# EAGLE board Sensor-amplification_V3 (EAGLE 7.4.0)
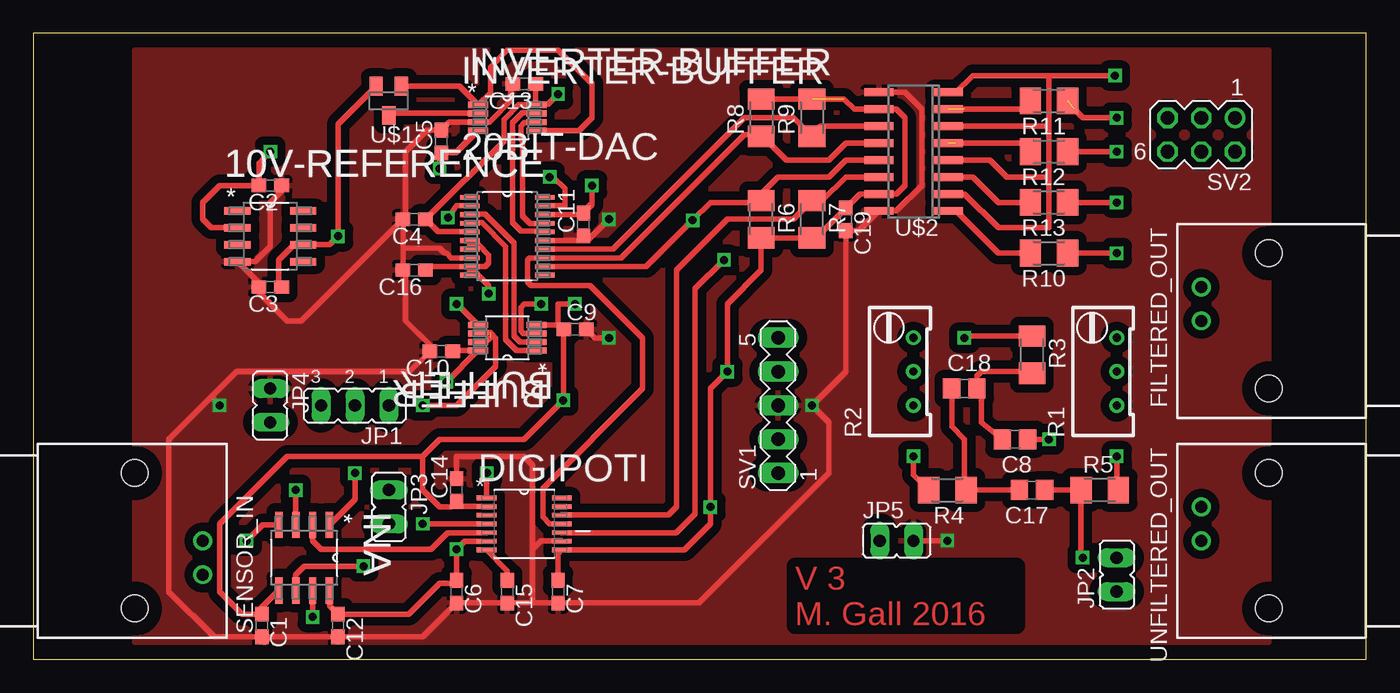
[diagram p0: board, top side]
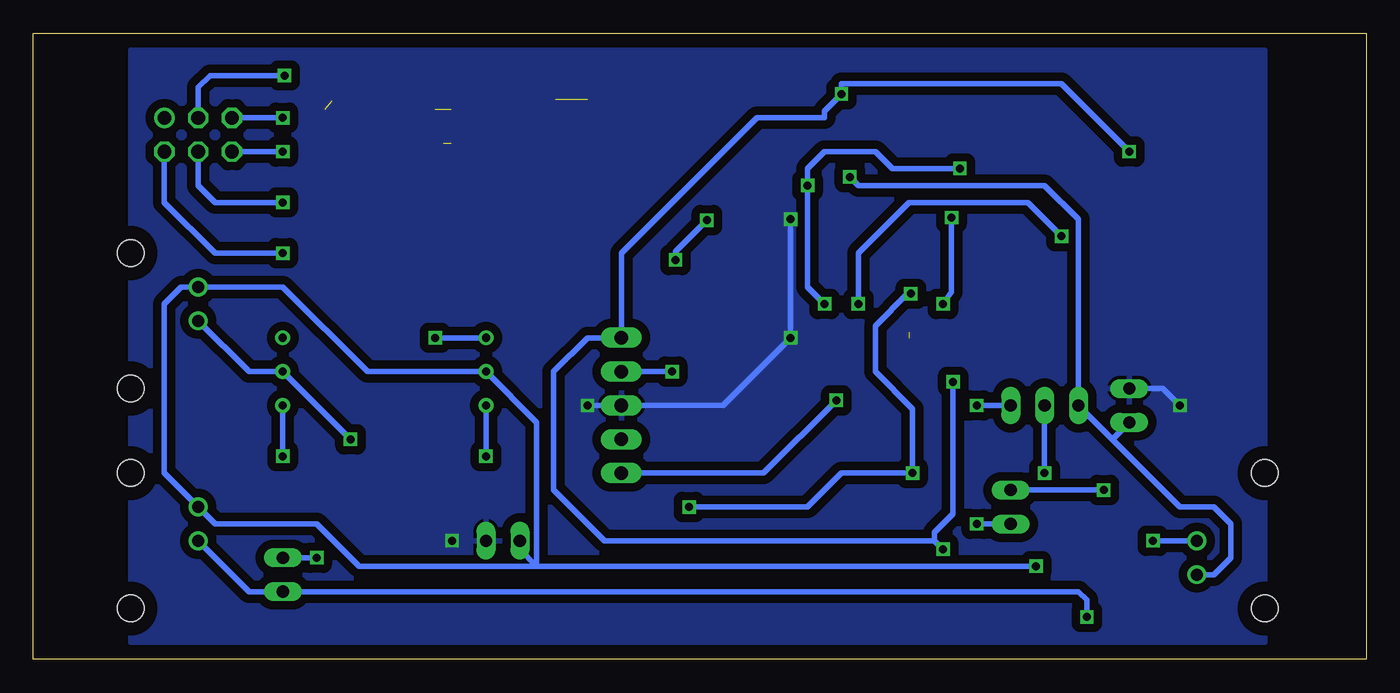
[diagram p1: board, bottom side, seen from below]

Size 100 x 46.98 mm. Coordinates in mm from the lower left corner, seen from the top.
Outline: 0,0 100,0 100,46.98 0,46.98 0,0
Copper layers (1*16): Top 0.035mm / dielectric 1.5mm / Bottom 0.035mm
Design rules "default": minimum track width 10mil, minimum drill 24mil, track to track 8mil, track to pad 8mil, pad to pad 8mil, via to via 8mil, smd to smd 8mil, copper to edge 40mil, drill to drill 8mil, minimum pad ring 10mil, minimum via ring 8mil, stop-mask expansion 4mil, vias tented up to drill 0mil, thermal gap 10mil

## Footprints (pad centres in the part's own frame; a part is rotated, then mirrored left to right if it is on the bottom)
SOIC127P600X175-8N = smd 1.981 x 0.559: 1 -2.464,1.905; 2 -2.464,0.635; 3 -2.464,-0.635; 4 -2.464,-1.905; 5 2.464,-1.905; 6 2.464,-0.635; 7 2.464,0.635; 8 2.464,1.905
SOP65P640X120-20N = smd 1.473 x 0.356: 1 -2.819,2.921; 2 -2.819,2.286; 3 -2.819,1.626; 4 -2.819,0.965; 5 -2.819,0.33; 6 -2.819,-0.33; 7 -2.819,-0.965; 8 -2.819,-1.626; 9 -2.819,-2.286; 10 -2.819,-2.921; 11 2.819,-2.921; 12 2.819,-2.286; 13 2.819,-1.626; 14 2.819,-0.965; 15 2.819,-0.33; 16 2.819,0.33; 17 2.819,0.965; 18 2.819,1.626; 19 2.819,2.286; 20 2.819,2.921
SOP65P490X110-8N = smd 1.499 x 0.457: 1 -2.184,0.965; 2 -2.184,0.33; 3 -2.184,-0.33; 4 -2.184,-0.965; 5 2.184,-0.965; 6 2.184,-0.33; 7 2.184,0.33; 8 2.184,0.965
C0603 = smd 1.1 x 1: 1 -0.85,0; 2 0.85,0
C0805 = smd 1.3 x 1.5: 1 -0.95,0; 2 0.95,0
SOP65P640X120-14N = smd 1.473 x 0.356: 1 -2.819,1.956; 2 -2.819,1.295; 3 -2.819,0.66; 4 -2.819,0; 5 -2.819,-0.66; 6 -2.819,-1.295; 7 -2.819,-1.956; 8 2.819,-1.956; 9 2.819,-1.295; 10 2.819,-0.66; 11 2.819,0; 12 2.819,0.66; 13 2.819,1.295; 14 2.819,1.956
AMP_227161 = drill 0.9 pad 1.27: 1 0,-5.08; 2 -2.54,-5.08 | hole 2: -5.08,0; 5.08,0
JP2 = drill 0.914 long: 1 -2.54,0; 2 0,0; 3 2.54,0
JP1 = drill 0.914 long: 1 0,-1.27; 2 0,1.27
RTRIM64W = drill 0.61: 1 1.27,-2.54; 2 1.27,0; 3 1.27,2.54
M1206 = smd 1.6 x 2: 1 -1.4,0; 2 1.4,0
MA05-1 = drill 1.016 long: 1 -5.08,0; 2 -2.54,0; 3 0,0; 4 2.54,0; 5 5.08,0
MA03-2 = drill 1.016: 1 -2.54,-1.27 | drill 1.016 octagon: 2 -2.54,1.27; 3 0,-1.27; 4 0,1.27; 5 2.54,-1.27; 6 2.54,1.27
SOT23 = smd 1 x 1.4: 1 -0.95,-1.1; 2 0.95,-1.1; 3 0,1.1
SO16 = smd 0.6 x 2.2: 1 -4.445,-2.6; 2 -3.175,-2.6; 3 -1.905,-2.6; 4 -0.635,-2.6; 5 0.635,-2.6; 6 1.905,-2.6; 7 3.175,-2.6; 8 4.445,-2.6; 9 4.445,2.6; 10 3.175,2.6; 11 1.905,2.6; 12 0.635,2.6; 13 -0.635,2.6; 14 -1.905,2.6; 15 -3.175,2.6; 16 -4.445,2.6

## Placement (x,y rotation side)
10V-REFERENCE  ADR01BRZ  [SOIC127P600X175-8N]  17.78,31.75 0 top
20BIT-DAC  AD5791ARUZ  [SOP65P640X120-20N]  35.56,31.75 0 top
BUFFER  AD8676ARMZ  [SOP65P490X110-8N]  35.56,24.13 180 top
C1  100n  [C0603]  17.14,2.54 270 top
C2  100n  [C0603]  17.78,35.56 180 top
C3  100n  [C0603]  17.78,27.94 180 top
C4  100n  [C0603]  28.57,33.02 180 top
C5  100n  [C0603]  30.61,38.86 90 top
C6  100n  [C0603]  31.75,5.08 270 top
C7  100n  [C0603]  39.37,5.08 270 top
C8  10n  [C0805]  73.66,16.51 180 top
C9  100n  [C0603]  40.64,24.77 0 top
C10  100n  [C0603]  30.61,23.11 180 top
C11  100n  [C0603]  41.27,32.64 90 top
C12  100n  [C0603]  22.86,2.54 270 top
C13  100n  [C0603]  36.83,43.18 180 top
C14  100n  [C0603]  31.75,12.7 90 top
C15  1µ  [C0603]  35.56,5.08 270 top
C16  100n  [C0603]  28.57,29.21 180 top
C17  10n  [C0805]  74.93,12.7 180 top
C18  10n  [C0805]  69.85,20.32 0 top
C19  100n  [C0603]  60.96,33.02 270 top
DIGIPOTI  AD5293BRUZ-100  [SOP65P640X120-14N]  36.83,10.16 0 top
FILTERED_OUT  1-227161-7  [AMP_227161]  92.71,25.4 270 top
INA  AD8421ARZ  [SOIC127P600X175-8N]  20.32,7.62 270 top
INVERTER-BUFFER  AD8676ARMZ  [SOP65P490X110-8N]  35.56,40.64 0 top
JP1  [JP2]  24.13,19.05 180 top
JP2  [JP1]  81.28,6.35 0 top
JP3  [JP1]  26.67,11.43 180 top
JP4  [JP1]  17.78,19.05 180 top
JP5  [JP1]  64.77,8.89 270 top
R1  2k  [RTRIM64W]  80.01,21.59 0 top
R2  500  [RTRIM64W]  64.77,21.59 0 top
R3  330  [M1206]  74.93,22.86 270 top
R4  330  [M1206]  68.58,12.7 180 top
R5  5600  [M1206]  80.01,12.7 0 top
R6  470  [M1206]  54.61,33.02 270 top
R7  470  [M1206]  58.42,33.02 270 top
R8  470  [M1206]  54.61,40.64 90 top
R9  470  [M1206]  58.42,40.64 90 top
R10  680  [M1206]  76.2,30.48 180 top
R11  680  [M1206]  76.2,41.91 180 top
R12  680  [M1206]  76.2,38.1 180 top
R13  680  [M1206]  76.2,34.29 180 top
SENSOR_IN  1-227161-7  [AMP_227161]  7.62,8.89 90 top
SV1  [MA05-1]  55.88,19.05 90 top
SV2  [MA03-2]  87.63,39.37 180 top
U$1  MPMT2001AT5  [SOT23]  26.67,41.91 180 top
U$2  ACSL-6400  [SO16]  66.04,38.1 90 top
UNFILTERED_OUT  1-227161-7  [AMP_227161]  92.71,8.89 270 top

## Library data of the parts
10V-REFERENCE = NaLi-specific; MPN: ADR01BRZ; OC_FARNELL: 2305769; OC_NEWARK: 59K2657; PACKAGE: SOIC-8; SUPPLIER: Analog Devices
20BIT-DAC = NaLi-specific; MPN: AD5791ARUZ; OC_FARNELL: 2074863; OC_NEWARK: 18T2142; PACKAGE: TSSOP-20; SUPPLIER: Analog Devices
BUFFER INVERTER-BUFFER = NaLi-specific; MPN: AD8676ARMZ; OC_FARNELL: 1776909; OC_NEWARK: 45P6471; PACKAGE: MSOP-8; SUPPLIER: ANALOG DEVICES
C1-C19 R1-R13 = resistor
DIGIPOTI = NaLi-specific; MPN: AD5293BRUZ-100; OC_FARNELL: -; OC_NEWARK: 52R8122; PACKAGE: TSSOP-14; SUPPLIER: Analog Devices
FILTERED_OUT SENSOR_IN UNFILTERED_OUT = con-coax; MF: TYCO ELECTRONICS; MPN: 1-227161-7; OC_FARNELL: unknown; OC_NEWARK: 09H7855
INA = NaLi-specific; MPN: AD8421ARZ; OC_FARNELL: 2126090; OC_NEWARK: 94T9482; PACKAGE: SOIC-8; SUPPLIER: Analog Devices
JP1-JP5 = jumper
SV1 SV2 = con-lstb; OC_FARNELL: unknown; OC_NEWARK: unknown
U$1 U$2 = NaLi-specific

## Nets
+5V: 20BIT-DAC.6 20BIT-DAC.7 20BIT-DAC.9 20BIT-DAC.10 C7.1 C16.1 C19.1 DIGIPOTI.1 DIGIPOTI.8 R6.2 R7.2 R8.2 R9.2 SV1.4 U$2.10 U$2.15
+15V: 10V-REFERENCE.2 20BIT-DAC.5 BUFFER.8 C2.2 C4.1 C6.1 C10.1 C12.1 C13.1 DIGIPOTI.6 INA.8 INVERTER-BUFFER.8 SV1.5
-15V: 20BIT-DAC.18 BUFFER.4 C1.1 C5.1 C9.1 C11.2 C14.1 DIGIPOTI.2 INA.5 INVERTER-BUFFER.4 SV1.1
AGND: 10V-REFERENCE.4 20BIT-DAC.8 20BIT-DAC.15 C1.2 C2.1 C3.2 C4.2 C5.2 C6.2 C7.2 C9.2 C10.2 C11.1 C12.2 C13.2 C14.2 C15.2 C16.2 C19.2 DIGIPOTI.9 INVERTER-BUFFER.3 JP4.1 JP5.2 SV1.3 U$2.9 U$2.16
DIN: 20BIT-DAC.12 DIGIPOTI.10 R6.1 U$2.13
N$1: INA.7 JP2.1 UNFILTERED_OUT.1
N$2: FILTERED_OUT.2 INA.6 JP5.1 R2.2 UNFILTERED_OUT.2
N$3: INA.3 JP3.1
N$4: DIGIPOTI.5 INA.2
N$5: INA.4 SENSOR_IN.1
N$6: 20BIT-DAC.19 JP1.3 JP4.2 SENSOR_IN.2
N$7: INA.1 JP1.2
N$8: DIGIPOTI.4 JP3.2
N$9: 10V-REFERENCE.6 BUFFER.3 C3.1 U$1.2
N$10: 20BIT-DAC.2 BUFFER.5
N$11: 20BIT-DAC.4 BUFFER.1
N$12: 20BIT-DAC.3 BUFFER.2
N$13: INVERTER-BUFFER.2 U$1.3
N$14: 20BIT-DAC.16 INVERTER-BUFFER.7
N$15: 20BIT-DAC.17 INVERTER-BUFFER.6
N$16: INVERTER-BUFFER.1 INVERTER-BUFFER.5 U$1.1
N$17: C15.1 DIGIPOTI.7
N$18: C17.2 C18.1 R4.1
N$19: C8.2 C18.2 R3.2
N$20: C8.1 FILTERED_OUT.1 R1.2
N$21: C17.1 JP2.2 R5.1
N$22: R2.3 R3.1
N$23: R2.1 R4.2
N$24: R1.1 R5.2
N$25: SV2.3 U$2.2 U$2.4 U$2.6 U$2.8
N$26: R11.2 U$2.7
N$27: R12.2 U$2.5
N$28: R13.2 U$2.3
N$29: R10.1 SV2.2
N$30: R10.2 U$2.1
N$31: R13.1 SV2.4
N$32: R12.1 SV2.6
N$33: R11.1 SV2.5
SCLK: 20BIT-DAC.13 DIGIPOTI.11 R8.1 U$2.12
SUBSTRACT_SELECT: BUFFER.6 BUFFER.7 JP1.1
SYNC-DAC: 20BIT-DAC.14 R9.1 U$2.11
SYNC-POTI: DIGIPOTI.12 R7.1 U$2.14

## Tracks (layer width: path | path; a pad name or v marks a point on that pad's centre or on a via)
+5V  (via drill 0.6)  (1 unrouted)
  Top 0.406: C7.1 39.37,7.92 DIGIPOTI.8 48.84,8.2 50.8,10.16 v50.8,11.43 50.8,20.32 v52.07,21.59 52.07,26.67 54.61,29.21 R6.2 R7.2 58.71,31.62 C19.1 62.02,34.92 U$2.15 64.77,34.92 65.41,35.56 65.41,40.64 64.77,41.27 U$2.10 61.59,41.27 60.83,42.04 R8.2 | C16.1 29.68,29.46 20BIT-DAC.9 | 20BIT-DAC.10 20BIT-DAC.9 | DIGIPOTI.1 34.01,13.95 v34.04,13.97 | v34.16,27.43 34.16,28.04 20BIT-DAC.9 | 20BIT-DAC.9 33.91,29.46 34.16,29.72 34.16,30.35 33.4,31.11 33.07,31.11 20BIT-DAC.7 20BIT-DAC.6
  Bottom 0.406: v50.8,11.43 41.91,11.43 39.37,13.97 v34.04,13.97 34.04,18.8 36.83,21.59 36.83,25.02 34.42,27.43 v34.16,27.43 | SV1.4 v52.07,21.59
+15V  (via drill 0.6)
  Top 0.406: INA.8 22.23,4.03 C12.1 28.16,3.39 30.48,5.71 31.54,5.71 C6.1 v31.75,8.26 32.36,8.87 DIGIPOTI.6 | INVERTER-BUFFER.8 37.68,41.67 C13.1 | 10V-REFERENCE.2 13.34,32.38 12.7,33.02 12.7,34.29 13.97,35.56 C2.2 16.93,37.25 v17.78,38.1 | 20BIT-DAC.5 30.36,32.08 C4.1 35.31,38.9 35.31,40.51 36.4,41.6 INVERTER-BUFFER.8 | C10.1 31.51,23.16 BUFFER.8 33.33,23.16 v30.99,20.83 | v39.37,42.42 38.61,41.66 37.8,41.66 INVERTER-BUFFER.8
  Bottom 0.406: 32.38,8.89 57.15,8.89 60.96,12.7 60.96,21.59 58.42,24.13 SV1.5 55.88,30.48 45.72,40.64 40.64,40.64 40.64,41.15 v39.37,42.42 39.37,43.18 22.86,43.18 v17.78,38.1 | 32.38,8.89 v31.75,8.26 | 32.38,8.89 32.38,9.53 30.99,10.92 v30.99,20.83
-15V  (via drill 0.6)
  Top 0.406: INA.5 17.14,3.89 C1.1 15.66,3.39 13.97,5.08 13.97,10.16 19.05,15.24 29.21,15.24 | DIGIPOTI.2 32.15,11.46 C14.1 31.33,11.43 30.48,11.43 29.21,12.7 29.21,15.24 | C5.1 31.71,38.01 INVERTER-BUFFER.4 33.33,39.67 31.75,38.1 30.48,38.1 v30.48,36.83 | 39.37,25.09 39.46,25.09 C9.1 39.79,19.47 v39.75,19.43 36.83,16.51 30.48,16.51 29.21,15.24 | 39.37,25.09 BUFFER.4 | 41.91,34.29 41.91,34.12 C11.2 41.16,33.38 20BIT-DAC.18 41,33.38 41.91,34.29 | 41.91,34.29 v41.91,35.56 | v40.64,26.67 39.37,26.67 39.37,25.09
  Bottom 0.406: SV1.1 45.21,13.97 v39.75,19.43 | v30.48,36.83 35.56,36.83 36.83,38.1 40.64,38.1 41.91,36.83 v41.91,35.56 41.91,27.94 v40.64,26.67
AGND  (via drill 0.6)
  Top 0.406: U$2.9 65.41,42.55 66.67,41.27 66.67,35.56 64.77,33.66 U$2.16 61.95,32.17 C19.2 60.96,21.59 v58.42,19.05 59.69,17.78 59.69,13.97 49.95,4.23 C7.2 37.47,4.23 | 37.47,4.23 C15.2 C6.2 29.21,1.69 C12.2 17.78,1.69 | 17.78,1.69 C1.2 13.55,1.69 10.16,5.08 10.16,16.51 13.34,19.68 | DIGIPOTI.9 39.62,8.89 38.1,8.89 37.47,8.26 | 37.47,8.26 37.47,4.23 | C2.1 18.63,35.14 17.78,34.29 17.78,30.99 16.64,29.84 10V-REFERENCE.4 16.93,28.23 C3.2 16.93,27.52 19.05,25.4 20.11,25.4 C4.2 | 27.73,30.73 C16.2 27.94,29 27.94,25.4 29.76,23.58 C10.2 28.23,21.59 15.24,21.59 13.34,19.68 | 27.73,30.73 C4.2 | C4.2 27.94,33.23 27.94,38.1 29.55,39.71 C5.2 31.2,40.31 INVERTER-BUFFER.3 34.21,40.31 35.81,41.91 35.81,43.01 C13.2 | 17.36,1.27 17.78,1.69 | 20BIT-DAC.15 40.91,31.42 | 40.91,31.42 C11.1 | 40.91,31.42 41.58,31.42 v43.18,33.02 | v43.18,24.13 42.12,24.13 C9.2 | 37.47,8.26 37.47,14.61 36.83,15.24 31.75,15.24 C14.2 | 20BIT-DAC.8 31.34,30.12 30.99,30.48 30.86,30.48 30.48,30.86 27.85,30.86 27.73,30.73 | v13.97,19.05 13.34,19.68 | JP5.2 v68.58,8.89
  Bottom 0.406: v43.18,33.02 v43.18,24.13 48.26,19.05 SV1.3 v58.42,19.05 | JP4.1 15.24,20.32 v13.97,19.05
  pour Top (isolate 0.635): 7.62,45.72 7.62,1.27 92.71,1.27 92.71,45.72
  pour Bottom (isolate 0.635): 7.62,45.72 7.62,1.27 92.71,1.27 92.71,45.72
DIN  (via drill 0.6)
  Top 0.406: U$2.13 60.96,37.47 59.69,36.2 55.88,36.2 54.61,34.92 R6.1 54.48,34.29 50.8,34.29 v49.47,32.96 45.97,29.46 20BIT-DAC.12 | DIGIPOTI.10 48.23,9.5 49.66,10.92 49.66,27.81 v51.82,29.97
  Bottom 0.406: v51.82,29.97 51.82,30.61 v49.47,32.96
N$1  (via drill 0.6)
  Top 0.406: INA.7 v20.95,3.17
  Bottom 0.406: UNFILTERED_OUT.1 83.82,5.08 JP2.1 21.59,5.08 20.95,4.45 v20.95,3.17
N$2  (via drill 0.6)
  Top 0.406: INA.6 19.68,6.35 20.32,6.99 v24.77,6.99
  Bottom 0.406: 62.23,6.99 75.56,6.99 78.74,10.16 86.36,10.16 UNFILTERED_OUT.2 90.17,13.97 90.17,26.67 88.9,27.94 FILTERED_OUT.2 81.28,27.94 74.93,21.59 R2.2 62.23,17.78 62.23,6.99 | 62.23,6.99 v24.77,6.99 | 62.23,6.99 63.5,8.26 JP5.1
N$3  (via drill 0.6)
  Top 0.406: v19.68,12.7 INA.3
  Bottom 0.406: JP3.1 v19.68,12.7
N$4
  Top 0.406: INA.2 20.95,8.89 21.59,8.26 29.84,8.26 31.09,9.5 DIGIPOTI.5
N$5  (via drill 0.6)
  Top 0.406: v16,8.89 17.2,10.08 INA.4
  Bottom 0.406: SENSOR_IN.1 v16,8.89
N$6  (via drill 0.6)
  Top 0.406: 20BIT-DAC.19 39.88,34.04 39.88,35.31 38.99,36.2 v38.73,36.2
  Bottom 0.406: SENSOR_IN.2 11.43,6.35 10.16,7.62 10.16,10.16 11.43,11.43 13.97,11.43 19.05,16.51 | 19.05,16.51 JP1.3 21.59,33.02 24.13,35.56 38.1,35.56 v38.73,36.2 | JP4.2 19.05,16.51
N$7  (via drill 0.6)
  Top 0.406: INA.1 24.13,11.99 v24.13,13.97
  Bottom 0.406: v24.13,13.97 JP1.2
N$8  (via drill 0.6)
  Top 0.406: v29.21,10.16 DIGIPOTI.4
  Bottom 0.406: JP3.2 v29.21,10.16
N$9  (via drill 0.6)
  Top 0.406: C3.1 18.41,28.16 18.41,29.97 19.56,31.11 10V-REFERENCE.6 22.23,31.11 v22.86,31.75 22.86,40.15 U$1.2 | BUFFER.3 36.75,24.46 36.58,24.64 36.58,26.42 36.83,26.67 v38.1,26.67
  Bottom 0.406: v38.1,26.67 38.1,30.48 34.29,34.29 25.4,34.29 v22.86,31.75
N$10  (via drill 0.6)
  Top 0.406: 20BIT-DAC.2 31.75,34.04 v31.11,33.15 | v31.75,26.67 31.8,26.67 BUFFER.5
  Bottom 0.406: v31.11,33.15 31.11,27.56 v31.75,26.67
N$11
  Top 0.406: BUFFER.1 36.27,23.16 35.43,24 35.43,30.99 33.66,32.77 32.79,32.77 20BIT-DAC.4
N$12
  Top 0.406: BUFFER.2 36.52,23.8 36.07,24.26 36.07,31.24 33.91,33.4 32.77,33.4 20BIT-DAC.3
N$13
  Top 0.406: U$1.3 26.83,40.97 INVERTER-BUFFER.2
N$14
  Top 0.406: INVERTER-BUFFER.7 37.69,41.02 36.7,41.02 35.94,40.26 35.94,32.77 36.58,32.13 38.33,32.13 20BIT-DAC.16
N$15
  Top 0.406: INVERTER-BUFFER.6 37.69,40.26 36.83,40.26 36.58,40.01 36.58,38.99 36.7,38.86 36.7,33.27 37.26,32.72 20BIT-DAC.17
N$16
  Top 0.406: INVERTER-BUFFER.5 40.95,39.67 41.91,40.64 41.91,43.18 39.37,45.72 35.56,45.72 34.29,44.45 34.29,42.52 INVERTER-BUFFER.1 31.97,43.01 U$1.1
N$17
  Top 0.406: DIGIPOTI.7 35.56,6.66 C15.1
N$18
  Top 0.406: C17.2 R4.1 69.85,12.83 69.85,16.51 68.9,17.46 C18.1
N$19
  Top 0.406: R3.2 74.8,21.59 71.12,21.59 70.8,21.27 C18.2 71.12,20 71.12,17.78 C8.2
N$20  (via drill 0.6)
  Top 0.406: C8.1 v76.2,16.51
  Bottom 0.406: v76.2,16.51 R1.2 83.82,21.59 FILTERED_OUT.1
N$21  (via drill 0.6)
  Top 0.406: C17.1 R5.1 78.61,7.75 v78.74,7.62
  Bottom 0.406: JP2.2 v78.74,7.62
N$22  (via drill 0.6)
  Top 0.406: v69.85,24.13 69.98,24.26 R3.1
  Bottom 0.406: R2.3 v69.85,24.13
N$23  (via drill 0.6)
  Top 0.406: R4.2 66.04,13.84 v66.04,15.24
  Bottom 0.406: v66.04,15.24 R2.1
N$24  (via drill 0.6)
  Top 0.406: R5.2 81.28,12.83 v81.28,15.24
  Bottom 0.406: v81.28,15.24 R1.1
N$25  (via drill 0.6)
  Top 0.406: 76.2,43.81 70.48,43.81 69.22,42.55 U$2.8 | U$2.6 76.2,40.01 | 76.2,40.01 76.2,43.81 | U$2.4 71.75,37.47 73.03,36.2 76.2,36.2 | 76.2,36.2 76.2,40.01 | U$2.2 69.85,34.92 72.39,32.38 76.2,32.38 76.2,36.2 | 76.2,43.81 v81.15,43.81
  Bottom 0.406: v81.15,43.81 86.74,43.81 87.63,42.93 SV2.3
N$26  (1 unrouted)
  Top 0.406: R11.2 74.17,41.27 69.85,41.27
N$27  (1 unrouted)
  Top 0.406: R12.2 74.17,38.73 69.22,38.73
N$28
  Top 0.406: R13.2 72.39,34.29 70.48,36.2 U$2.3
N$29  (via drill 0.6)
  Top 0.406: R10.1 v81.28,30.48
  Bottom 0.406: v81.28,30.48 86.36,30.48 90.17,34.29 SV2.2
N$30
  Top 0.406: R10.2 72.39,30.48 69.22,33.66 U$2.1
N$31  (via drill 0.6)
  Top 0.406: R13.1 v81.28,34.29
  Bottom 0.406: v81.28,34.29 86.36,34.29 87.63,35.56 SV2.4
N$32  (via drill 0.6)
  Top 0.406: R12.1 v81.28,38.1
  Bottom 0.406: v81.28,38.1 SV2.6
N$33  (via drill 0.6)  (1 unrouted)
  Top 0.406: 78.11,41.27 78.74,40.64 v81.28,40.64
  Bottom 0.406: v81.28,40.64 SV2.5
SCLK
  Top 0.406: U$2.12 60.96,38.73 59.69,37.47 56.52,37.47 54.74,39.24 R8.1 54.48,39.37 53.34,39.37 44.09,30.12 20BIT-DAC.13 37.24,30.12 37.08,29.97 37.08,28.32 37.34,28.07 41.78,28.07 45.72,24.13 45.72,20.32 38.23,12.83 38.23,10.67 38.73,10.16 DIGIPOTI.11
SUBSTRACT_SELECT  (via drill 0.6)  (1 unrouted)
  Top 0.406: BUFFER.6 33.43,24.51 34.29,24.51 34.67,24.13 34.67,21.97 31.75,19.05 v29.21,19.05 | BUFFER.7 33.96,23.8 34.29,24.13
  Bottom 0.406: JP1.1 v29.21,19.05
SYNC-DAC
  Top 0.406: U$2.11 59.05,40.01 58.42,39.37 R9.1 57.02,40.64 53.34,40.64 43.48,30.79 20BIT-DAC.14
SYNC-POTI
  Top 0.406: U$2.14 60.96,36.2 59.19,34.42 R7.1 57.02,33.02 52.07,33.02 48.26,29.21 48.26,11.43 47.65,10.82 DIGIPOTI.12

## Text on the board
Top: V 3 / M. Gall 2016